# EAGLE board BRD (EAGLE 7.6.0)
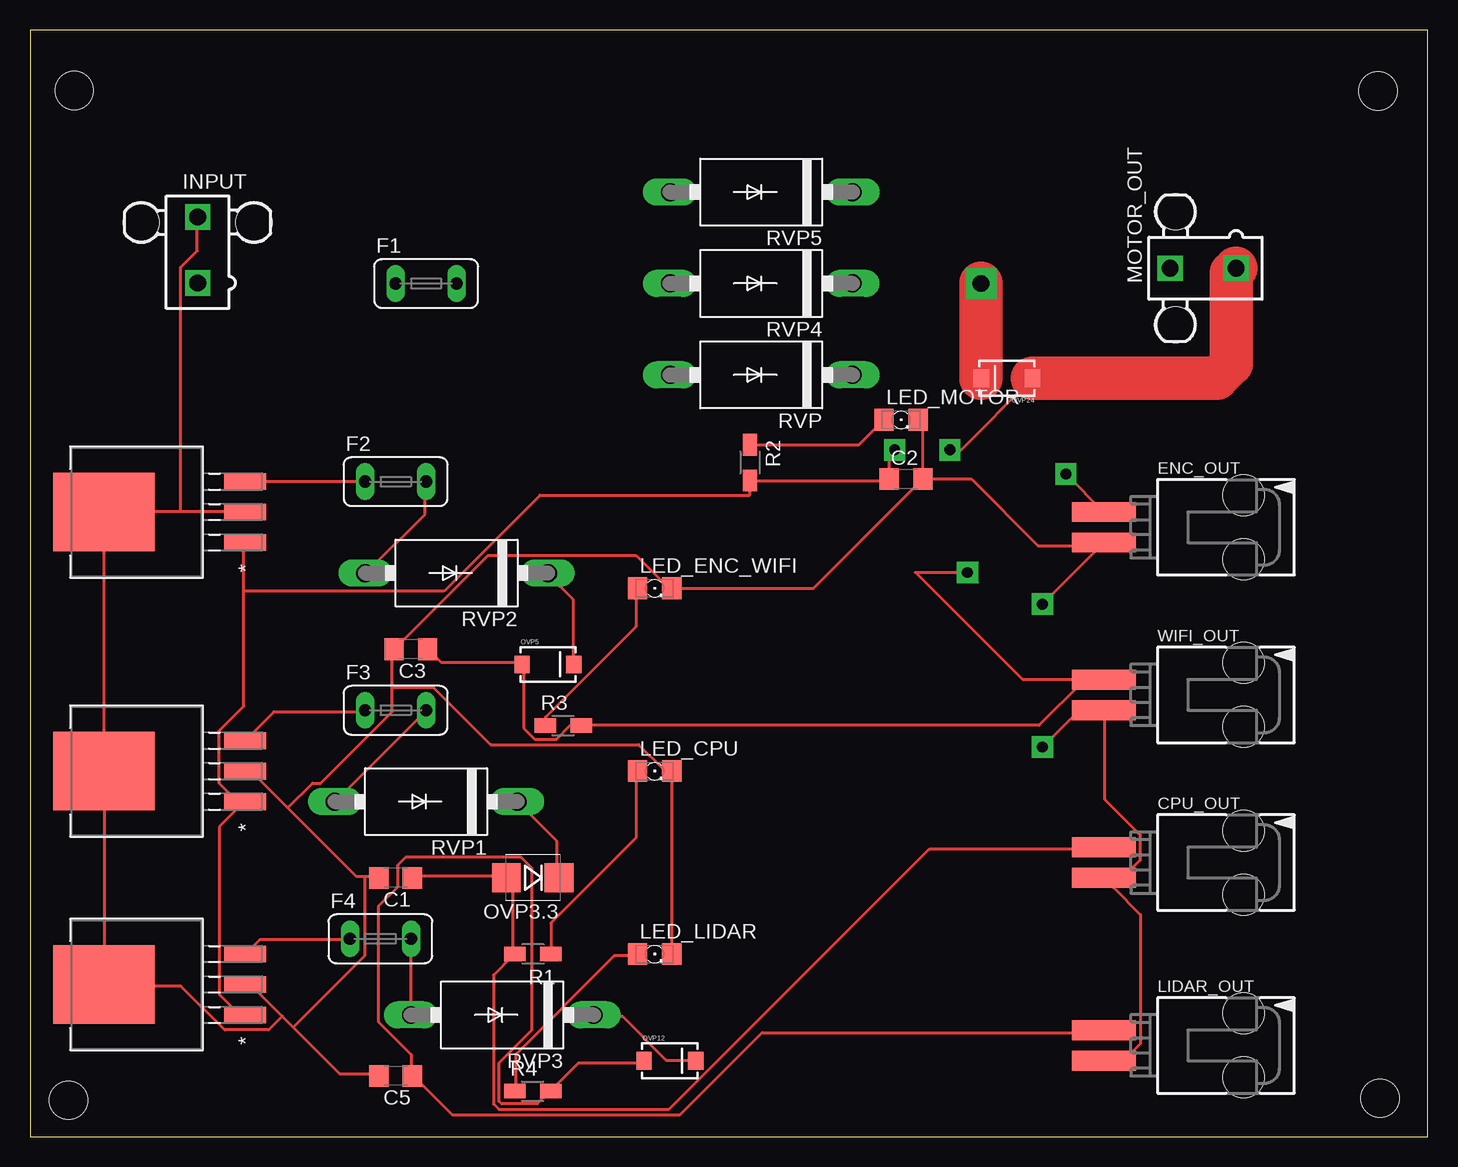
[diagram p0: board, top side]
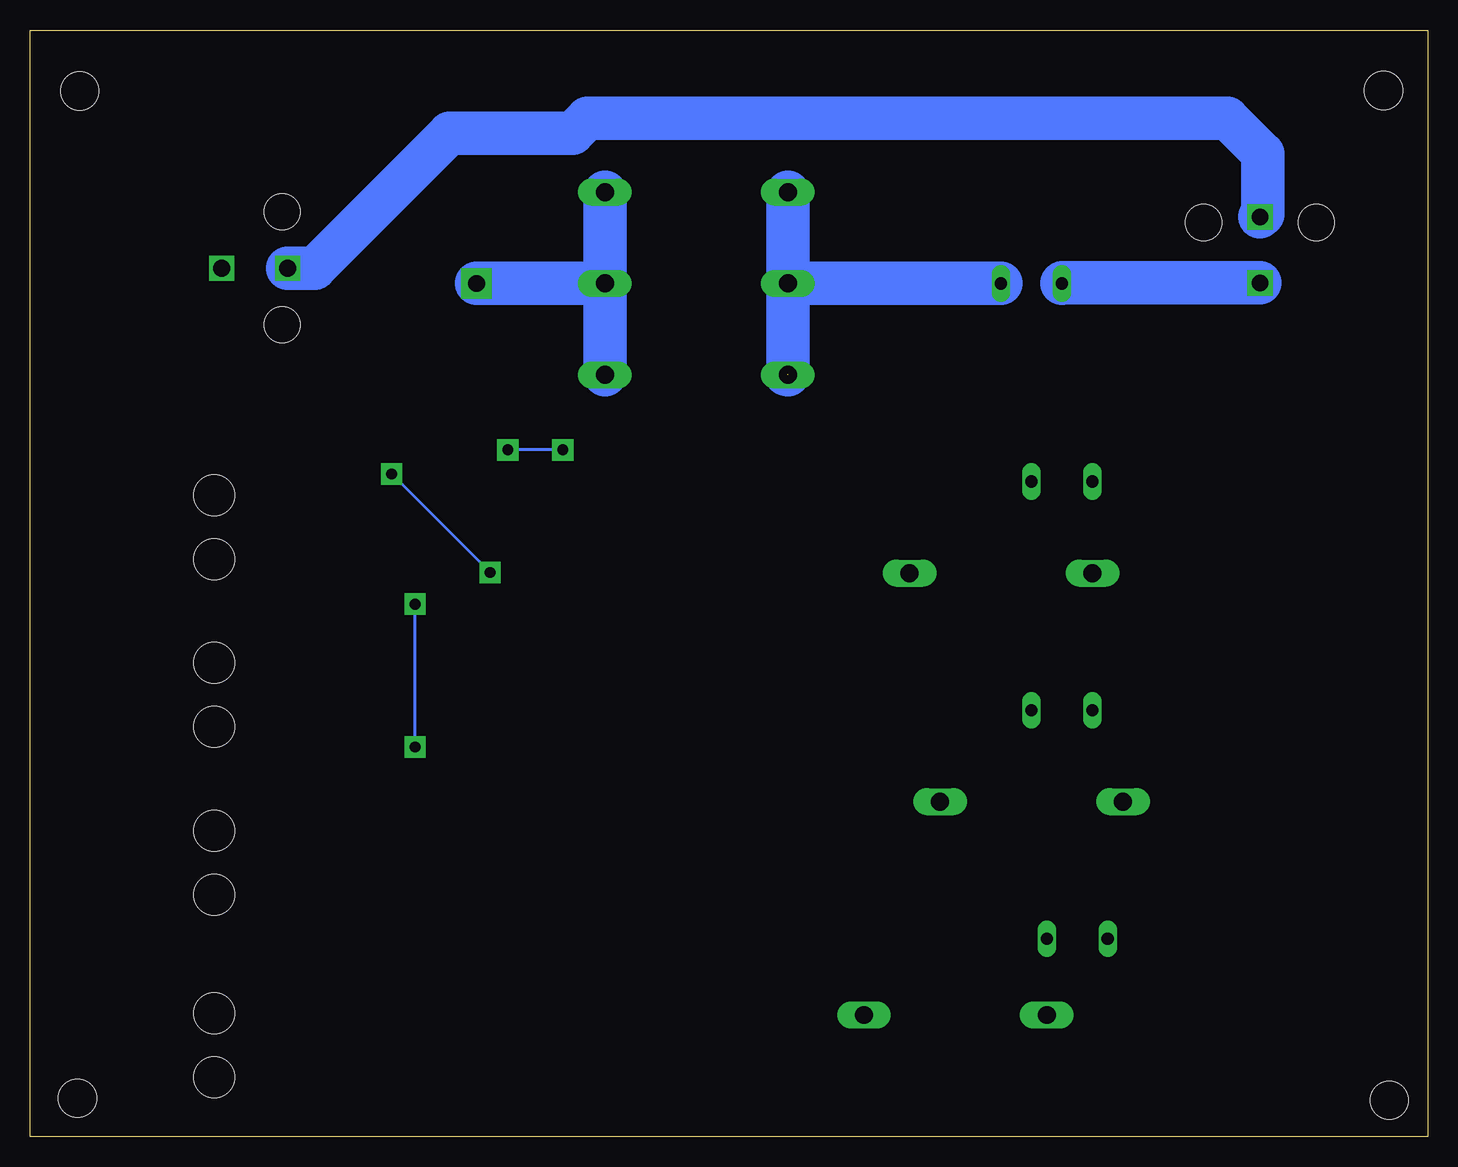
[diagram p1: board, bottom side, seen from below]

Size 116.51 x 92.24 mm. Coordinates in mm from the lower left corner, seen from the top.
Outline: 0,0 116.51,0 116.51,92.24 0,92.24 0,0
Copper layers (1*16): Top 0.035mm / dielectric 1.5mm / Bottom 0.035mm
Design rules "default": minimum track width 10mil, minimum drill 24mil, track to track 8mil, track to pad 8mil, pad to pad 8mil, via to via 8mil, smd to smd 8mil, copper to edge 40mil, drill to drill 8mil, minimum pad ring 10mil, minimum via ring 8mil, stop-mask expansion 4mil, vias tented up to drill 0mil, thermal gap 10mil
Holes 3.17 mm at 3.68,87.2 112.55,3.23 112.37,87.15 3.2,3.05

## Footprints (pad centres in the part's own frame; a part is rotated, then mirrored left to right if it is on the bottom)
C1206 = smd 1.6 x 1.8: 1 -1.4,0; 2 1.4,0
15-91-02 = smd 1.651 x 5.334: 1 -1.27,-10.795; 2 1.27,-10.795 | hole 3.404: -2.667,0.838; 2.667,0.838
TE5 = drill 1.016 long: 1 -2.54,0; 2 2.54,0
5566-2 = drill 1.4 square: 1 0,-2.75; 2 0,2.75 | hole 3: 4.7,2.29; -4.7,2.29
1206 = smd 1.6 x 1.803: A -1.422,0; C 1.422,0
SMB-DIODE = smd 2.4 x 2.4: A 2.2,0; C -2.2,0
SMA-DIODE = smd 1.27 x 1.47: A -2.15,0; C 2.15,0
R1206W = smd 1.8 x 1.2: 1 -1.499,0; 2 1.499,0
DO201-15 = drill 1.499 long: A 7.62,0; C -7.62,0
TO-263-3 = smd 1.397 x 3.505: 1 -2.54,-9.055; 2 0,-9.055; 3 2.54,-9.055 | smd 6.553 x 8.458: 4 0,2.743

## Placement (x,y rotation side)
C1  0.1UF  [C1206]  30.48,21.59 180 top
C2  0.1UF  [C1206]  73.03,54.84 0 top
C3  0.1UF  [C1206]  31.75,40.64 180 top
C5  0.1UF  [C1206]  30.48,5.08 180 top
CPU_OUT  C-GRID-02-15-19  [15-91-02]  100.33,22.86 270 top
ENC_OUT  C-GRID-02-15-19  [15-91-02]  100.33,50.8 270 top
F1  15A  [TE5]  33.02,71.12 0 top
F2  1A  [TE5]  30.48,54.61 0 top
F3  1A  [TE5]  30.48,35.56 0 top
F4  2A  [TE5]  29.21,16.51 0 top
INPUT  5566-2  [5566-2]  13.97,73.91 0 top
LED_CPU  RED  [1206]  52.07,30.48 0 top
LED_ENC_WIFI  RED  [1206]  52.07,45.72 0 top
LED_LIDAR  RED  [1206]  52.07,15.24 0 top
LED_MOTOR  RED  [1206]  72.62,59.77 0 top
LIDAR_OUT  C-GRID-02-15-19  [15-91-02]  100.33,7.62 270 top
MOTOR_OUT  5566-2  [5566-2]  97.79,72.39 90 top
OVP3.3  DIODE-ZENERSMB  [SMB-DIODE]  41.91,21.59 180 top
OVP5  TVSSMA  [SMA-DIODE]  43.18,39.37 0 top
OVP12  TVSSMA  [SMA-DIODE]  53.34,6.35 0 top
OVP24  TVSSMA  [SMA-DIODE]  81.43,63.22 180 top
R1  82OHM  [R1206W]  41.91,15.24 180 top
R2  1.1KOHM  [R1206W]  60.02,56.18 270 top
R3  180OHM  [R1206W]  44.45,34.29 0 top
R4  560OHM  [R1206W]  41.91,3.81 0 top
RVP  1N5400  [DO201-15]  60.96,63.5 180 top
RVP1  1N5400  [DO201-15]  33.02,27.94 180 top
RVP2  1N5400  [DO201-15]  35.56,46.99 180 top
RVP3  1N5400  [DO201-15]  39.37,10.16 180 top
RVP4  1N5400  [DO201-15]  60.96,71.12 180 top
RVP5  1N5400  [DO201-15]  60.96,78.74 180 top
U1  MIC29300-3.3WU  [TO-263-3]  8.89,30.48 90 top
U2  MIC29300-5.0WU  [TO-263-3]  8.89,52.07 90 top
U3  MIC29300-12WU  [TO-263-3]  8.89,12.7 90 top
WIFI_OUT  C-GRID-02-15-19  [15-91-02]  100.33,36.83 270 top

## Library data of the parts
C1-C3 C5 LED_CPU LED_ENC_WIFI LED_LIDAR LED_MOTOR = adafruit
CPU_OUT ENC_OUT LIDAR_OUT WIFI_OUT = con-molex; OC_FARNELL: unknown; OC_NEWARK: unknown
F1-F4 = fuse; OC_FARNELL: unknown; OC_NEWARK: unknown
INPUT MOTOR_OUT = con-molex; OC_FARNELL: 1822072; OC_NEWARK: unknown
OVP3.3 OVP5 OVP12 OVP24 = SparkFun-DiscreteSemi
R1-R4 = resistor
RVP RVP1-RVP5 = diode
U1 = MIC29300-5WU; COPYRIGHT: Copyright (C) 2015 Accelerated Designs. All rights reserved; MANUFACTURER_PART_NUMBER: mic29300-3.3wu; VENDOR: MICREL
U2 = MIC29300-5WU; COPYRIGHT: Copyright (C) 2015 Accelerated Designs. All rights reserved; MANUFACTURER_PART_NUMBER: mic29300-5.0wu; VENDOR: MICREL
U3 = MIC29300-5WU; COPYRIGHT: Copyright (C) 2015 Accelerated Designs. All rights reserved; MANUFACTURER_PART_NUMBER: mic29300-12wu; VENDOR: MICREL

## Nets
24V_P: C2.1 MOTOR_OUT.1 OVP24.A R2.2 U1.1 U2.1 U3.1
+3V3: C1.1 CPU_OUT.1 OVP3.3.A R1.2
+5V: C3.1 ENC_OUT.1 OVP5.A R3.2 WIFI_OUT.1
+12V: C5.1 LIDAR_OUT.1 OVP12.A R4.2
+24V: F1.1 INPUT.1
GND: C1.2 C2.2 C3.2 C5.2 CPU_OUT.2 ENC_OUT.2 INPUT.2 LED_CPU.C LED_ENC_WIFI.C LED_LIDAR.C LED_MOTOR.C LIDAR_OUT.2 MOTOR_OUT.2 U1.2 U1.4 U2.2 U2.4 U3.2 U3.4 WIFI_OUT.2
N$1: F1.2 RVP4.A RVP5.A RVP.A
N$2: OVP24.C RVP4.C RVP5.C RVP.C
N$3: F3.1 U1.3
N$4: F2.1 U2.3
N$5: F4.1 U3.3
N$6: F3.2 RVP1.A
N$7: F2.2 RVP2.A
N$8: F4.2 RVP3.A
N$9: OVP3.3.C RVP1.C
N$10: OVP5.C RVP2.C
N$11: OVP12.C RVP3.C
N$12: LED_CPU.A R1.1
N$14: LED_MOTOR.A R2.1
N$15: LED_ENC_WIFI.A R3.1
N$16: LED_LIDAR.A R4.1

## Tracks (layer width: path | path; a pad name or v marks a point on that pad's centre or on a via)
24V_P  (via drill 0.9 pad 1.78)
  Top 0.254: 17.6,27.66 17.83,27.89 U1.1 17.6,27.66 | 17.6,27.66 15.77,25.83 15.77,11.89 17.37,10.29 17.83,10.29 U3.1 | 17.83,45.49 17.83,35.89 15.77,33.83 15.77,29.49 17.6,27.66 | 17.83,45.49 17.83,49.38 U2.1 | 17.83,45.49 34.52,45.49 42.52,53.49 60.02,53.49 R2.2 71.47,54.69 C2.1 71.62,56.79 v72.08,57.25 | v76.68,57.25 76.78,57.15 77.51,57.15 OVP24.A
  Top 3.607: OVP24.A 98.93,63.22 100.15,64.44 100.15,72 MOTOR_OUT.1
  Bottom 0.254: v72.08,57.25 v76.68,57.25
+3V3
  Top 0.254: C1.1 32,21.72 39.55,21.72 OVP3.3.A 39.78,21.49 40.23,21.03 40.23,15.32 R1.2 40.23,15.09 38.63,13.49 38.63,2.74 39.09,2.29 53.26,2.29 74.98,24 89.38,24 CPU_OUT.1
+5V  (via drill 0.9 pad 1.78)
  Top 0.254: C3.1 33.38,40.46 34.29,39.55 40.92,39.55 OVP5.A 41.15,39.32 41.15,34.06 42.06,33.15 43.89,33.15 45.03,34.29 R3.2 84.12,34.29 87.78,37.95 89.38,37.95 WIFI_OUT.1 82.75,38.1 73.81,47.04 v78.16,47.04 | 89.43,51.97 ENC_OUT.1 v86.36,55.24
  Bottom 0.254: v78.16,47.04 v86.36,55.24
+12V
  Top 0.254: OVP12.A 50.98,6.17 45.72,6.17 43.43,3.89 R4.2 43.2,3.66 42.29,2.74 39.32,2.74 39.09,2.97 39.09,6.17 41.83,8.91 41.83,22.4 40.92,23.32 31.32,23.32 30.63,22.63 30.63,20.8 29.03,19.2 29.03,9.6 31.77,6.86 31.77,5.26 C5.1 32,5.03 35.2,1.83 54.18,1.83 61.04,8.69 89.38,8.69 LIDAR_OUT.1
+24V
  Bottom 3.607: INPUT.1 30.44,71.16 F1.1
GND  (via drill 0.9 pad 1.78)
  Top 0.254: 90.3,20.8 89.61,21.49 CPU_OUT.2 90.3,20.8 | 90.3,20.8 92.58,18.52 92.58,7.77 91.21,6.4 89.61,6.4 LIDAR_OUT.2 | 90.3,20.8 92.58,23.09 92.58,25.15 89.61,28.12 89.61,35.43 WIFI_OUT.2 88.01,35.56 87.96,35.51 87.43,35.51 v84.4,32.49 | 12.57,52.12 6.17,52.12 U2.4 6.17,51.89 6.17,30.63 U1.4 6.17,30.4 6.17,12.8 U3.4 6.17,12.57 12.57,12.57 16.23,8.91 19.89,8.91 21.03,10.06 | 12.57,52.12 17.83,52.12 U2.2 | 12.57,52.12 12.57,72.47 13.95,73.84 13.95,76.58 INPUT.2 | 21.03,10.06 18.52,12.57 18.06,12.57 U3.2 | 21.03,10.06 21.95,9.14 | 21.95,9.14 25.83,5.26 29.03,5.26 C5.2 | LED_LIDAR.C 53.49,15.32 53.49,30.4 LED_CPU.C 53.26,30.63 52.81,30.63 50.75,32.69 38.41,32.69 33.6,37.49 30.18,37.49 | 27.89,21.72 27.2,21.72 21.49,27.43 | 27.89,21.72 29.03,21.72 C1.2 | 21.49,27.43 18.52,30.4 18.06,30.4 U1.2 | 30.18,37.49 30.18,35.43 24.23,29.49 23.55,29.49 21.49,27.43 | 30.18,37.49 30.18,40.46 C3.2 30.4,40.69 38.18,48.46 50.52,48.46 53.26,45.72 LED_ENC_WIFI.C 65.31,45.72 C2.2 | 21.95,9.14 27.89,15.09 27.89,21.72 | C2.2 74.42,59.38 LED_MOTOR.C | C2.2 78.46,54.84 84.02,49.28 89.28,49.28 ENC_OUT.2 v84.4,44.4
  Bottom 0.254: v84.4,32.49 v84.4,44.4
  Bottom 3.607: MOTOR_OUT.2 92.79,72.39 81.53,83.64 71.27,83.64 70.03,84.89 16.71,84.89 13.74,81.92 13.74,76.89 INPUT.2
N$1  (1 unrouted)
  Bottom 3.607: 53.34,71.09 RVP4.A | 53.49,63.55 53.34,63.55 | RVP4.A RVP5.A | RVP.A RVP4.A | F1.2 RVP4.A
N$2  (via drill 1.4 pad 2.54)
  Top 3.607: v79.28,71.12 OVP24.C
  Bottom 3.607: RVP.C RVP4.C | RVP4.C RVP5.C | RVP4.C v79.28,71.12
N$3
  Top 0.254: F3.1 27.89,35.43 20.34,35.43 18.06,33.15 U1.3
N$4
  Top 0.254: F2.1 27.89,54.63 18.06,54.63 U2.3
N$5
  Top 0.254: F4.1 26.52,16.46 19.2,16.46 18.06,15.32 U3.3
N$6
  Top 0.254: F3.2 32.92,35.43 25.6,28.12 RVP1.A
N$7
  Top 0.254: F2.2 32.92,54.41 32.92,51.89 28.12,47.09 RVP2.A
N$8
  Top 0.254: F4.2 31.77,16.46 31.77,10.29 RVP3.A
N$9
  Top 0.254: RVP1.C 43.89,24.69 43.89,21.72 OVP3.3.C
N$10
  Top 0.254: OVP5.C 45.26,39.55 45.26,44.81 43.2,46.86 RVP2.C
N$11
  Top 0.254: OVP12.C 55.32,6.4 53.03,6.4 49.38,10.06 47.09,10.06 RVP3.C
N$12
  Top 0.254: R1.1 43.43,15.32 43.43,17.83 50.52,24.92 50.52,30.4 LED_CPU.A
N$14
  Top 0.254: R2.1 69.11,57.68 LED_MOTOR.A
N$15
  Top 0.254: R3.1 42.98,34.29 42.98,34.98 50.52,42.52 50.52,45.72 LED_ENC_WIFI.A
N$16
  Top 0.254: R4.1 40.46,3.89 40.46,6.86 48.69,15.09 50.52,15.09 LED_LIDAR.A